# Altium PCB Can2USB.PcbDoc
Units mil, origin at the board's own origin, x right, y up, seen from the top; angles counter-clockwise.
Board outline 2500 x 715 mil, 4 copper layers (Signal 1, Ground, Power, Signal 2), stack 23.756 mil thick; 50 components, 52 nets, 244 pads, 0 vias.
Unrouted connection lines stored in the file: 160.
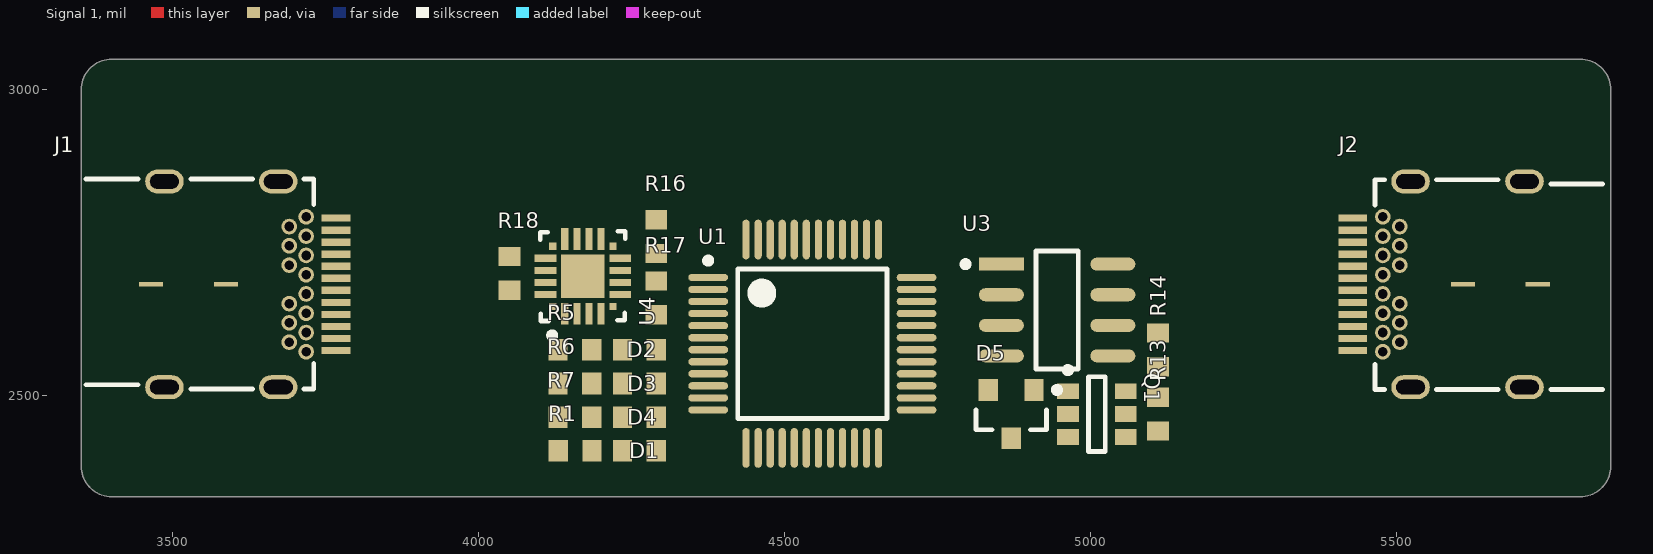
[diagram p0: Signal 1 view]
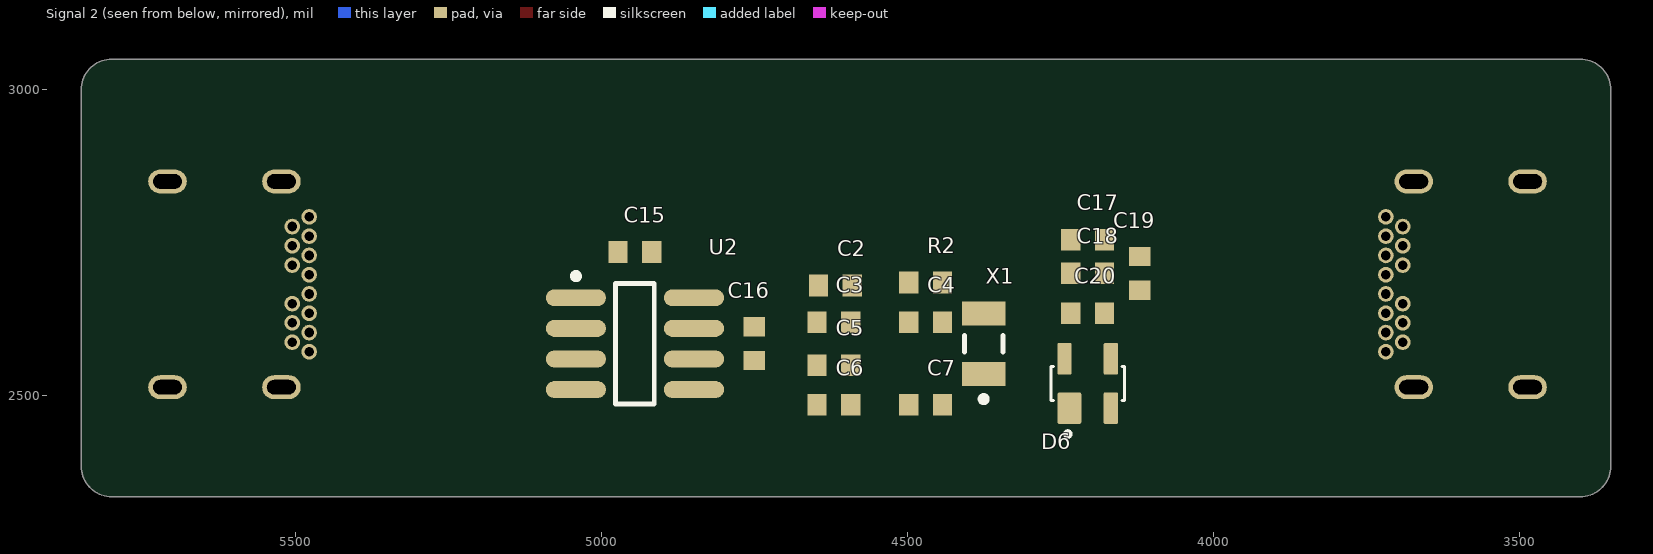
[diagram p1: Signal 2 view, seen from below]

## Layer stack, top to bottom
Top Solder: solder mask 0.4, Solder Resist, Dk 3.5
Signal 1: signal copper 1.4
Dielectric 2: prepreg 2.8, PP-006, Dk 4.1
Ground: signal copper 1.378
Dielectric 1: dielectric 12.6, FR-4, Dk 4.8
Power: signal copper 1.378
Dielectric 3: prepreg 2.8, PP-006, Dk 4.1
Signal 2: signal copper 1.4
Bottom Solder: solder mask 0.4, Solder Resist, Dk 3.5

## Board outline
3350,2385 3350,3000 cw(c3400,3000) 3400,3050 5800,3050 cw(c5800,3000) 5850,3000 5850,2385 cw(c5800,2385) 5800,2335 3400,2335 cw(c3400,2385)

## Design rules (kind name [scope] priority, off if disabled: settings)
Clearance [All] p1: gap=5 ignorepadtopadclearanceinfootprint=TRUE except(0: Arc-Hole Track-Hole SMDPad-Hole THPad-Hole Via-Hole Fill-Hole Poly-Hole Region-Hole Text-Hole)
ComponentClearance [All] p1: gap=3 collisioncheckmode=3 verticalgap=10 showdistances=FALSE
HoleSize [All] p1: absolutevalues=TRUE maxlimit=30 minlimit=8 maxpercent=80.000 minpercent=20.000
MinimumAnnularRing [All] p1: minimumring=4
PolygonConnect [All] p1: connectstyle=Relief reliefconductorwidth=10 reliefentries=4 polygonreliefangle="90 Angle" airgapwidth=10
RoutingVias [All] p1: holewidth=10 width=20 viastyle="Through Hole" minholewidth=8 minwidth=16 maxholewidth=25 maxwidth=33
SolderMaskExpansion [All] p1: expansion=4 istentingtop=FALSE
Width [All] p1: maxlimit=25 minlimit=5 preferedwidth=10 midlayer1_minwidth=10 midlayer1_maxwidth=10 midlayer2_minwidth=10 midlayer2_maxwidth=10 minimp=50.000000 maximp=50.000000 favimp=50.000000
28 further rules are at their usual default settings.

## Classes and differential pairs
component class USB: C14 C15 C16 C17 C18 C19 C20 D5 D6 J1 R13 R14 R15 R16 R17 R18 U3 U4
component class Main: C1 C2 C3 C4 C5 C6 C7 C8 C10 C11 C12 D1 D2 D3 D4 Q1 R1 R2 R3 R4 R5 R6 R7 R8 R9 R10 R11 R12 U1 U2 X1
component class IO: J2

## Components (designator, comment, footprint, x,y, rotation, side; value= is the part's Value field where it differs from the comment)
C1 "4.3pF" 1608[0603] 4640,3145 r0 top
C2 "100nF" 1608[0603] 4617.56,2680 r180 bottom
C3 "100nF" 1608[0603] 4620,2620 r180 bottom
C4 "4.7uF" 1608[0603] 4470,2620 r0 bottom
C5 "100nF" 1608[0603] 4620,2550 r180 bottom
C6 "1uF" 1608[0603] 4620,2485 r180 bottom
C7 "10nF" 1608[0603] 4470,2485 r180 bottom
C8 "4.3pF" 1608[0603] 4185,3415 r0 top
C10 "100nF" 1608[0603] 4755,3720 r90 top
C11 "100nF" 1608[0603] 4975,3720 r90 top
C12 "100nF" 1608[0603] 3655,3720 r90 top
C14 "100nF" 1608[0603] 5050,4380 r90 top
C15 "100nF" 1608[0603] 4945,2735 r0 bottom
C16 "100nF" 1608[0603] 4750,2585 r270 bottom value=1µF
C17 "100nF" 1608[0603] 4205,2755 r180 bottom value=4.7µF
C18 "100nF" 1608[0603] 4205,2700 r180 bottom value=0.1µF
C19 "100nF" 1608[0603] 4120,2700 r90 bottom value=4.7µF
C20 "100nF" 1608[0603] 4205,2635 r0 bottom value=0.1µF
D1 "POWER_ON" 1608[0603] 4262.44,2410 r180 top
D2 "POWER_ON" 1608[0603] 4262.44,2575 r180 top
D3 "POWER_ON" 1608[0603] 4262.44,2520 r180 top
D4 "POWER_ON" 1608[0603] 4262.44,2465 r180 top
D5 "NUP2105LT1G" ONSC-SOT-23-3-318-08_V 4870,2470 r270 top
D6 "SP0503BAHTG" SOT143 4205,2520 r180 bottom
J1 "632723300011" 632723300011 3533.31,2682.01 r270 top
J2 "632723300011" 632723300011 5661.69,2682.01 r90 top
Q1 "NX7002AKAR" SOT23-6_L 5010,2470 r0 top
R1 "4.7k" 1608[0603] 4157.44,2410 r180 top value=3kΩ
R2 "10k" 1608[0603] 4470,2685 r180 bottom value=10kΩ
R3 "10k" 1608[0603] 5545,3745 r0 top value=10kΩ
R4 "10k" 1608[0603] 5715,3745 r0 top value=10kΩ
R5 "4.7k" 1608[0603] 4157,2575 r180 top value=3kΩ
R6 "4.7k" 1608[0603] 4157,2520 r0 top value=3kΩ
R7 "4.7k" 1608[0603] 4157,2465 r180 top value=3kΩ
R8 "10k" 1608[0603] 5205,3745 r0 top value=10kΩ
R9 "0 ohm" 1608[0603] 5375,3745 r0 top value=0Ω
R10 "3k" 1608[0603] 3875,3720 r90 top value=3kΩ
R11 "3k" 1608[0603] 3455,3720 r90 top value=3kΩ
R12 "10k" 1608[0603] 2820,3720 r90 top value=10Ω
R13 "60 ohm" 1608[0603] 5110,2470 r270 top value=60
R14 "60 ohm" 1608[0603] 5110,2575 r90 top value=60
R15 "3k" 1608[0603] 5885,4380 r90 top value=3kΩ
R16 "3k" 1608[0603] 4290,2760 r270 top value=22.1kΩ
R17 "3k" 1608[0603] 4290,2660 r270 top value=47.5kΩ
R18 "3k" 1608[0603] 4050,2700 r90 top value=3kΩ
U1 "STM32F042C4T6" STM-LQFP48_M 4545,2585 r0 top
U2 "M24C64" SO8_M 4945,2585 r180 bottom
U3 "TCAN337GDR" FP-D0008A-IPC_C 4945,2640 r0 top
U4 "CP2102N-A01-GQFN20R" FP-CP2102N-A01-GQFN20R-MFG 4170,2695 r90 top
X1 "FC-135 32.7680KA-A3" ESPO-FC-135-2_V 4375,2585 r90 bottom

## Footprints (in the part's own frame and the unit in brackets; to place one, negate y for a bottom-side part, rotate by r counter-clockwise, add the part's x,y. Pads: shape width x height; smd on the part's side, far side on the other; paste and mask are expansions set on the pad)
1608[0603] [mm] "Chip Capacitor, Body 1.6x0.8mm, IPC High Density"
  rect 0.8x0.9 smd: 1(-0.7,0) 2(0.7,0)
  body extent -0.87,-0.48 0.87,0.48, height 1.3
632723300011 [mm] "USB 3.1 Type C Receptacle Horizontal THR"
  rect 0.3x1.2 smd: A1(-2.75,5.93) A2(-2.25,5.93) A3(-1.75,5.93) A4(-1.25,5.93) A5(-0.75,5.93) A6(-0.25,5.93) A7(0.25,5.93) A8(0.75,5.93) A9(1.25,5.93) A10(1.75,5.93) A11(2.25,5.93) A12(2.75,5.93)
  round 0.65 hole 0.4: B1(2.8,4.68) B2(2.4,3.98) B3(1.6,3.98) B4(1.2,4.68) B5(0.8,3.98) B6(0.4,4.68) B7(-0.4,4.68) B8(-0.8,3.98) B9(-1.2,4.68) B10(-1.6,3.98) B11(-2.4,3.98) B12(-2.8,4.68) G1(2,4.68) G2(-2,4.68)
  oval 1x1.6 hole 0.6 slot 1.2 at 90 deg: Shell(-4.27,3.53) Shell(-4.27,-1.2) Shell(4.27,3.53) Shell(4.27,-1.2)
  rect 0.2x1 smd: Shell(0,1.35) Shell(0,-1.75)
  silkscreen extent -4.37,-4.45 4.34,5, body extent -4.37,-5.6 4.37,6.19, height 3.05
ESPO-FC-135-2_V [mm] "SMD, 2-Leads, Body 3.3x1.6mm, Pitch 2.5mm"
  rect 1x1.8 smd: 1(-1.25,0) 2(1.25,0)
  silkscreen extent -2.42,-0.8 0.35,0.8, body extent -1.65,-0.8 1.65,0.8, height 0.9
FP-CP2102N-A01-GQFN20R-MFG [mm]
  rect 0.3x0.3 smd paste+0 mask+0: 1(-1.25,1.25) 6(-1.25,-1.25) 11(1.25,-1.25) 16(1.25,1.25)
  rect 0.9x0.3 smd paste+0 mask+0: 2(-1.55,0.75) 3(-1.55,0.25) 4(-1.55,-0.25) 5(-1.55,-0.75) 12(1.55,-0.75) 13(1.55,-0.25) 14(1.55,0.25) 15(1.55,0.75)
  rect 0.3x0.9 smd paste+0 mask+0: 7(-0.75,-1.55) 8(-0.25,-1.55) 9(0.25,-1.55) 10(0.75,-1.55) 17(0.75,1.55) 18(0.25,1.55) 19(-0.25,1.55) 20(-0.75,1.55)
  rect 1.8x1.8 smd paste-1000 mask+0: 21(0,0)
  silkscreen extent -2.57,-1.76 1.88,1.77, body extent -2.1,-2.1 2.1,2.1, height 0.25
FP-D0008A-IPC_C [mil]
  rect 73.59x21.34 smd paste+0 mask+0: 1(-91.09,75)
  rrect100% 73.59x21.34 smd paste+0 mask+0: 2(-91.09,25) 3(-91.09,-25) 4(-91.09,-75) 5(91.09,-75) 6(91.09,-25) 7(91.09,25) 8(91.09,75)
  silkscreen extent -154,-97 35,97, body extent -132,-100 132,100, height 10
ONSC-SOT-23-3-318-08_V [mm] "SOT23, 3-Leads, Body 2.92x1.3mm, Pitch 0.95mm"
  rect 0.9x0.8 smd: 1(-1,0.95) 2(-1,-0.95) 3(1,0)
  silkscreen extent -1.12,-1.46 0.65,2.03, body extent -0.65,-1.46 0.65,1.46, height 1.11
SO8_M [mm] "SOIC, 8-Leads, Body 4.9x3.9mm, Pitch 1.27mm, IPC Low Density"
  oval 2.5x0.7 smd: 1(-2.45,1.905) 2(-2.45,0.635) 3(-2.45,-0.635) 4(-2.45,-1.905) 5(2.45,-1.905) 6(2.45,-0.635) 7(2.45,0.635) 8(2.45,1.905)
  silkscreen extent -2.58,-2.5 0.8,2.93, body extent -2,-2.5 2,2.5, height 1.75
SOT23-6_L [mm] "SOT23, 6-Leads, Body 2.9x1.6mm, Pitch 0.95mm, Lead Span 2.7mm, IPC High Density"
  rect 0.9x0.65 smd: 1(-1.2,0.95) 2(-1.2,0) 3(-1.2,-0.95) 4(1.2,-0.95) 5(1.2,0) 6(1.2,0.95)
  silkscreen extent -1.32,-1.55 0.35,1.95, body extent -0.9,-1.55 0.9,1.55, height 1.45
SOT143 [mm]
  rrect15% 0.99x1.3 smd: 1(-0.76,-1.025)
  rrect15% 0.59x1.3 smd: 2(0.96,-1.025) 3(0.96,1.025) 4(-0.96,1.025)
  silkscreen extent -1.52,-2.2 1.52,0.7
STM-LQFP48_M [mm] "QFP, 48-Leads, Body 7x7mm, Pitch 0.5mm, IPC Low Density"
  oval 1.65x0.3 smd: 1(-4.325,2.75) 2(-4.325,2.25) 3(-4.325,1.75) 4(-4.325,1.25) 5(-4.325,0.75) 6(-4.325,0.25) 7(-4.325,-0.25) 8(-4.325,-0.75) 9(-4.325,-1.25) 10(-4.325,-1.75) 11(-4.325,-2.25) 12(-4.325,-2.75) 25(4.325,-2.75) 26(4.325,-2.25) 27(4.325,-1.75) 28(4.325,-1.25) 29(4.325,-0.75) 30(4.325,-0.25) 31(4.325,0.25) 32(4.325,0.75) 33(4.325,1.25) 34(4.325,1.75) 35(4.325,2.25) 36(4.325,2.75)
  oval 0.3x1.65 smd: 13(-2.75,-4.325) 14(-2.25,-4.325) 15(-1.75,-4.325) 16(-1.25,-4.325) 17(-0.75,-4.325) 18(-0.25,-4.325) 19(0.25,-4.325) 20(0.75,-4.325) 21(1.25,-4.325) 22(1.75,-4.325) 23(2.25,-4.325) 24(2.75,-4.325) 37(2.75,4.325) 38(2.25,4.325) 39(1.75,4.325) 40(1.25,4.325) 41(0.75,4.325) 42(0.25,4.325) 43(-0.25,4.325) 44(-0.75,4.325) 45(-1.25,4.325) 46(-1.75,4.325) 47(-2.25,4.325) 48(-2.75,4.325)
  silkscreen extent -4.45,-3.1 3.1,3.57, body extent -3.5,-3.5 3.5,3.5, height 1.6

## Part data
C1 C2 C3 C4 C5 C6 C7 C8 C10 C11 C12 C14 C15 C16 C17 C18 C19 C20: library part "Cap Semi", "Capacitor (Semiconductor SIM Model)", LatestRevisionDate=29-May-2009, LatestRevisionNote="IPC-7351 Footprint Added.", PackageDescription="Chip Capacitor", PackageReference=C1206, Published=8-Jun-2000, Publisher="Altium Limited"
D1 D2 D3 D4: library part LED2, "Typical RED, GREEN, YELLOW, AMBER GaAs LED", LatestRevisionDate=17-Jul-2002, LatestRevisionNote="Re-released for DXP Platform.", PackageDescription="SM LED; 2 Flat Leads", PackageReference=3.2X1.6X1.1, PackageVersion=Feb-2002, Published=8-Jun-2000, Publisher="Altium Limited"
D5: library part CMP-1063-00164-1, "Dual Line CAN Bus Protector, 3-Pin SOT-23, Pb-Free, Tape and Reel", Manufacturer="On Semiconductor", C Max (pF)=30, ComponentLink1Description="Manufacturer URL", ComponentLink1URL=http://www.onsemi.com/, ComponentLink2Description=Datasheet, ComponentLink2URL=http://www.onsemi.cn/pub_link/Collateral/NUP2105L-D.PDF, ComponentLink3Description="Package Specification", ComponentLink3URL=http://www.onsemi.cn/pub_link/Collateral/318-08.PDF, DatasheetVersion="Rev. 5", Direction=Bidirectional, IR Max (uA)=0.1, Mounting Technology="Surface Mount", Number of Lines=2, PackageDescription="3-Pin Small Outline Transistor, Body 2.92 x 1.3 mm, Pitch 0.95 mm", PackageReference=SOT-23-3-318-08, PackageVersion="Rev. AP, 11/2009", Packing="Tape and Reel", PartNumber=NUP2105LT1G, PPK Max (W)=350, RoHS=Pb-Free, V(BR) Min (V)=26.2
D6: library part LFUS-SP0503BAHTG-SOT143-4, "TVS Diode Array, 30 pF, 30 KV, -40 to 85 degC, 4-Pin SOT143, RoHS, Tape and Reel", Capacitance Value=30pF, Clamping Voltage=8V, Leakage Current=0.1uA, Manufacturer=Littelfuse, Operating Temp Range=-40Cto85C, Operating Temperature Classification=Industrial, Operating Temperature Max Deg. C=85C, Operating Temperature Min Deg. C=-40C, Package / Case=SOT-143, Reverse Stand-off Voltage=5.5(Min)V, Working Voltage=5.5V, Working Voltage (Max)=5.5V(Min), Clamping Voltage (Max)=8V, Configuration=Triple, Datasheet URL=https://datasheet.ciiva.com/15143/getdatasheetpartid-116020-15143550.pdf, Datasheet Version=Dec-13, Direction Type=Uni-Directional, Leakage Current (Max)=0.1uA, Manufacturer URL=http://www.littelfuse.com/, Mounting=SurfaceMount, Mounting Style=SurfaceMount, Number of Elements=3, Package Type=SOT-143, Packaging=TapeandReel, Pin Count=3+Tab, Polarity=Uni-Directional, Product Depth (mm)=1.4mm, Product Height (mm)=1.05mm, Product Length (mm)=3.04mm, Rad Hardened=No, Suppressor Type=TVS
J1 J2: library part CMP-1502-03214-1, "USB 3.1 Type C Receptacle WR-COM, Horizontal, SMT / THT", Contact Resistance=30mOhm, Manufacturer="Wurth Elektronik", Operating Temperature=-40to105degC, Rated Current=5A, Working Voltage=20VDC, Connector Type=USB3.1TypeC, Datasheet URL=https://katalog.we-online.de/em/datasheet/632723x00011%282%29.pdf, Gender=Receptacle, Manufacturer URL=http://www.we-online.de, Mounting Technology=SMT/THT, Orientation=Horizontal, Package Reference=632723300011, Packaging=TapeandReel, Part Number=632723300011, Publisher=WurthElektronik
Q1: library part MOSFET-N, "N-Channel MOSFET", LatestRevisionDate=17-Jul-2002, LatestRevisionNote="Re-released for DXP Platform.", PackageDescription="TO, Flat Index; 3 In-Line, Axial Leads; Body Dia. 4.6mm; Lead Dia. 0.5 mm (max)", PackageReference=E3, PackageVersion=1995/1996, Published=8-Jun-2000, Publisher="Altium Limited"
R1 R2 R3 R4 R5 R6 R7 R8 R9 R10 R11 R12 R13 R14 R15 R16 R17 R18: library part Res1, "Resistor", LatestRevisionDate=17-Jul-2002, LatestRevisionNote="Re-released for DXP Platform.", PackageDescription="Axial Device, Thru-Hole; 2 Leads; 0.3 in Pin Spacing", PackageReference=AXIAL-0.3, Published=8-Jun-2000, Publisher="Altium Limited"
U1: library part CMP-0304-00102-2, "ARM Cortex-M0 32-bit MCU, 16 KB Flash, 6 KB Internal RAM, 38 I/Os, 48-Pin LQFP, -40 to 85 degC, Tray", I/Os (High Current)=38, Manufacturer=STMicroelectronics, Operating Frequency(F) (Processor speed) (MHz)=48, Package Description="48-Pin Low Profile Quad Flat Package, Body 7 x 7 mm, Pitch 0.5 mm", Package Reference=LQFP48, Supply Voltage(Vcc) min (V)=2, ComponentLink1Description="Manufacturer URL", ComponentLink1URL=http://www.st.com/, ComponentLink2Description=Datasheet, ComponentLink2URL=http://www.st.com/st-web-ui/static/active/en/resource/technical/document/datasheet/DM00105814.pdf, Core="ARM Cortex-M0", DatasheetVersion="Rev. 5", FLASH Size (Prog) (kB)=16, Internal RAM Size (kB)=6, Mounting Technology="Surface Mount", Packing=Tray, PartNumber=STM32F042C4T6
U2: library part M24C64-RMN6P, "EEPROM I2C 64k"
U3: library part CMP-04872-000068-1, "IC TRANSCEIVER 1/1 8SOIC", Case/Package=SOIC, Max Operating Temperature=125°C, Max Supply Voltage=3.6V, Min Operating Temperature=-40°C, Min Supply Voltage=3V, Interface=CAN, Lead Free="Lead Free", Number of Pins=8, Packaging="Cut Tape", REACH SVHC="No SVHC", RoHS Compliant=Yes
U4: library part CMP-08093-000003-1, "IC BRIDGE USB TO UART 20QFN", Ambient Temperature Range High=+85°C, Ambient Temperature Range Low=-40°C, Manufacturer="Silicon Labs", Max Junction Temp=+105°C, Max Supply Voltage=5.25V, Min Supply Voltage=1.71V, Nominal Supply Current=9.5-13.7mA, Temperature="-40°C to +85°C", Automotive=No, Category=IC, ComponentLink2Description=Datasheet, ComponentLink2URL=https://www.silabs.com/documents/public/data-sheets/cp2102n-datasheet.pdf, Data Rate=3Mbits/s, Device Class L1="Integrated Circuits (ICs)", Device Class L2="Interface ICs", Device Class L3="USB Interface ICs", Digikey Description="IC BRIDGE USB TO UART 20QFN", Height=0.8mm, Interface=UART,USB, Lead Free=Yes, Manufacturer Part Number=CP2102N-A01-GQFN20R, Mouser Description="USB to USRT Bridge Controller 20-Pin QFN T/R", Number Of Ports=1, Octopart=https://octopart.com/cp2102n-a01-gqfn20r-silicon+labs-76789142, Package=CP2102N-A01-GQFN20R, RoHS=TRUE, Standoff Height=0mm, Temperature Range High=+85°C, Temperature Range Low=-40°C, Usb Standard="USB 2.0"
X1: library part CMP-2000-05107-1, "Crystal, 32.768 KHz, 12.5 pF, -40 to 85 degC, 2-Pin SMD, RoHS, Tape and Reel", Frequency=32.768kHz, Frequency Stability=20PPM, Load Capacitance=12.5pF, Manufacturer=Epson, Operating Temperature Range=-40Cto+85C, Package / Case=3.2mmx1.5mm, Package Description="2-Pin Surface Mount Device, Body 3.2 x 1.5 mm", Package Reference=FC-135, Brand=EpsonTiming, Datasheet URL=https://datasheet.ciiva.com/15116/getdatasheetpartid-112713-15116373.pdf, Datasheet Version=Nov-12, Drive Level=0.5uW, ESR=65kOhms, Factory Pack Quantity=250, Height=0.8mm, Length=3.2mm, Manufacturer URL=https://www.eea.epson.com/, Mounting Style=SMD/SMT, Packaging=Reel, Product Category=Crystals, RoHS=True, Series=FC-135R/FC-135/FC-255, Termination Style=SMD/SMT, Tolerance=20PPM, Type=kHzCrystal, Unit Weight=0.000564oz, Width=1.5mm

## Nets (pads, with @x,y where several pads share a name; then routed paths per layer and width w, separated by ;. In a path a pad name is that pad's centre, name@x,y a point inside that pad or via, vN(x,y) a via of type N, cw(c..) or ccw(c..) an arc to the next point about the centre after c; other vN are vias at no path point)
+3V3: C2.1 C3.1 C4.1 C5.1 C6.1 C7.1 C12.1 C15.1 C16.1 C19.1 C20.1 D2.1 D3.1 D4.1 J2.A4 J2.A9 J2.B4 J2.B9 R3.2 R4.2 R10.1 R11.1 R15.1 R18.1 U1.1 U1.9 U1.24 U1.36 U1.48 U2.8 U3.3 U4.6
GND: C1.2 C2.2 C3.2 C4.2 C5.2 C6.2 C7.2 C8.2 C10.2 C11.2 C12.2 C14.2 C15.2 C16.2 C17.2 C18.2 C19.2 C20.2 D5.3 D6.1 J1.A1 J1.A12 J1.B1 J1.B12 J1.G1 J1.G2 J1.Shell J2.A1 J2.A12 J2.B1 J2.B12 J2.G1 J2.G2 J2.Shell R1.2 R2.2 R5.2 R8.1 R9.1 R17.2 U1.8 U1.23 U1.35 U1.47 U2.1 U2.2 U2.3 U2.4 U3.2 U4.3 U4.10 U4.12 U4.21
NetC1_1: C1.1 U1.3 X1.2
NetC8_1: C8.1 U1.4 X1.1
NetC10_1: C10.1 R3.1 R8.2 U1.10
NetC11_1: C11.1 R4.1 R9.2 U1.11
NetC14_1: C14.1 R13.1 R14.2
NetD1_1: D1.1 U1.28
NetD1_2: D1.2 R1.1
NetD2_2: D2.2 R5.1
NetD3_2: D3.2 R6.1
NetD4_2: D4.2 R7.1
NetD5_1: D5.1 J2.A6 J2.B6 R13.2 U3.7
NetD5_2: D5.2 J2.A7 J2.B7 Q1.1 U3.6
NetD6_2: D6.2 J1.A6 U4.4
NetD6_4: D6.4 J1.A7 U4.5
NetJ1_A2: J1.A2
NetJ1_A3: J1.A3
NetJ1_A5: J1.A5
NetJ1_A8: J1.A8
NetJ1_A10: J1.A10
NetJ1_A11: J1.A11
NetJ1_B2: J1.B2
NetJ1_B3: J1.B3
NetJ1_B5: J1.B5
NetJ1_B6: J1.B6
NetJ1_B7: J1.B7
NetJ1_B8: J1.B8
NetJ1_B10: J1.B10
NetJ1_B11: J1.B11
NetQ1_2: Q1.2 R12.1
NetQ1_3: Q1.3 R14.1
NetR2_1: R2.1 U1.44
NetR6_2: R6.2 U4.20
NetR7_2: R7.2 U4.19
NetR10_2: R10.2 U1.43 U2.7
NetR11_2: R11.2 U1.5 U2.5
NetR12_2: R12.2 U1.26
NetR15_2: R15.2 U3.5
NetR16_2: R16.2 R17.1 U4.8
NetR18_2: R18.2 U1.22 U4.16
NetU1_6: U1.6 U2.6
NetU1_7: U1.7
NetU1_21: U1.21 U4.15
NetU1_25: U1.25 U4.13
NetU1_31: U1.31 U4.17
NetU1_32: U1.32 U3.4
NetU1_33: U1.33 U3.1
NetU1_42: U1.42 U4.18
NetU1_45: U1.45 U4.9
NetU1_46: U1.46 U4.14
VBUS: C17.1 C18.1 D6.3 J1.A4 J1.A9 J1.B4 J1.B9 R16.1 U4.7
pads on no net: J2.A2 J2.A3 J2.A5 J2.A8 J2.A10 J2.A11 J2.B2 J2.B3 J2.B5 J2.B8 J2.B10 J2.B11 Q1.4 Q1.5 Q1.6 U1.2 U1.12 U1.13 U1.14 U1.15 U1.16 U1.17 U1.18 U1.19 U1.20 U1.27 U1.29 U1.30 U1.34 U1.37 U1.38 U1.39 U1.40 U1.41 U3.8 U4.1 U4.2 U4.11

## Silkscreen, mask and mechanical layers (free items; w line width, h text height)
Mechanical 1:
  lines w10: 3350,2385 ccw(c3400,2385) 3400,2335 5800,2335 ccw(c5800,2385) 5850,2385 5850,3000 ccw(c5800,3000) 5800,3050 3400,3050 ccw(c3400,3000) 3350,3000 3350,2515 3350,2385

## Text inside footprints (layer, text, board x,y; h text height)
J1: Mechanical 2 "PCB Edge" at 3312.83,2748.94 h24 r270
J2: Mechanical 2 "PCB Edge" at 5882.17,2615.08 h24 r90